# EAGLE board main LF (EAGLE 9.6.2)
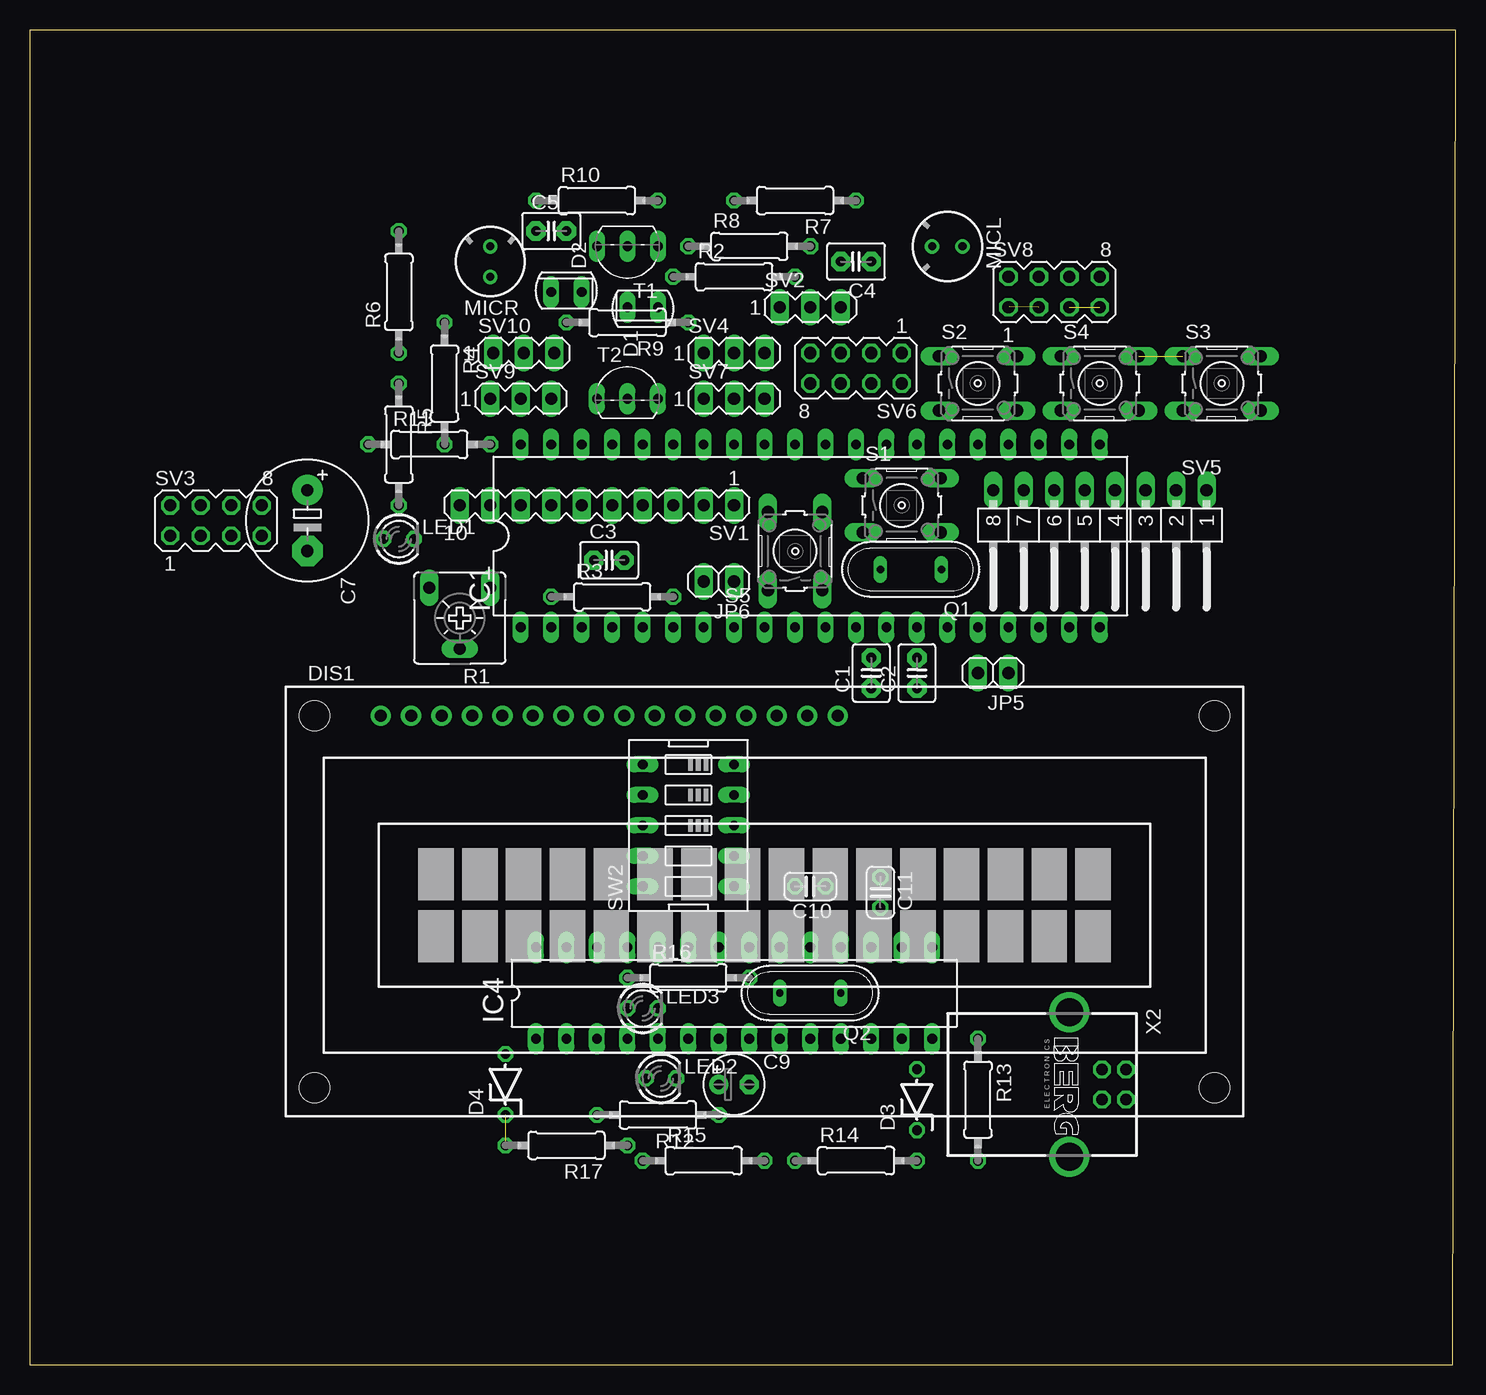
[diagram p0: board, top side]
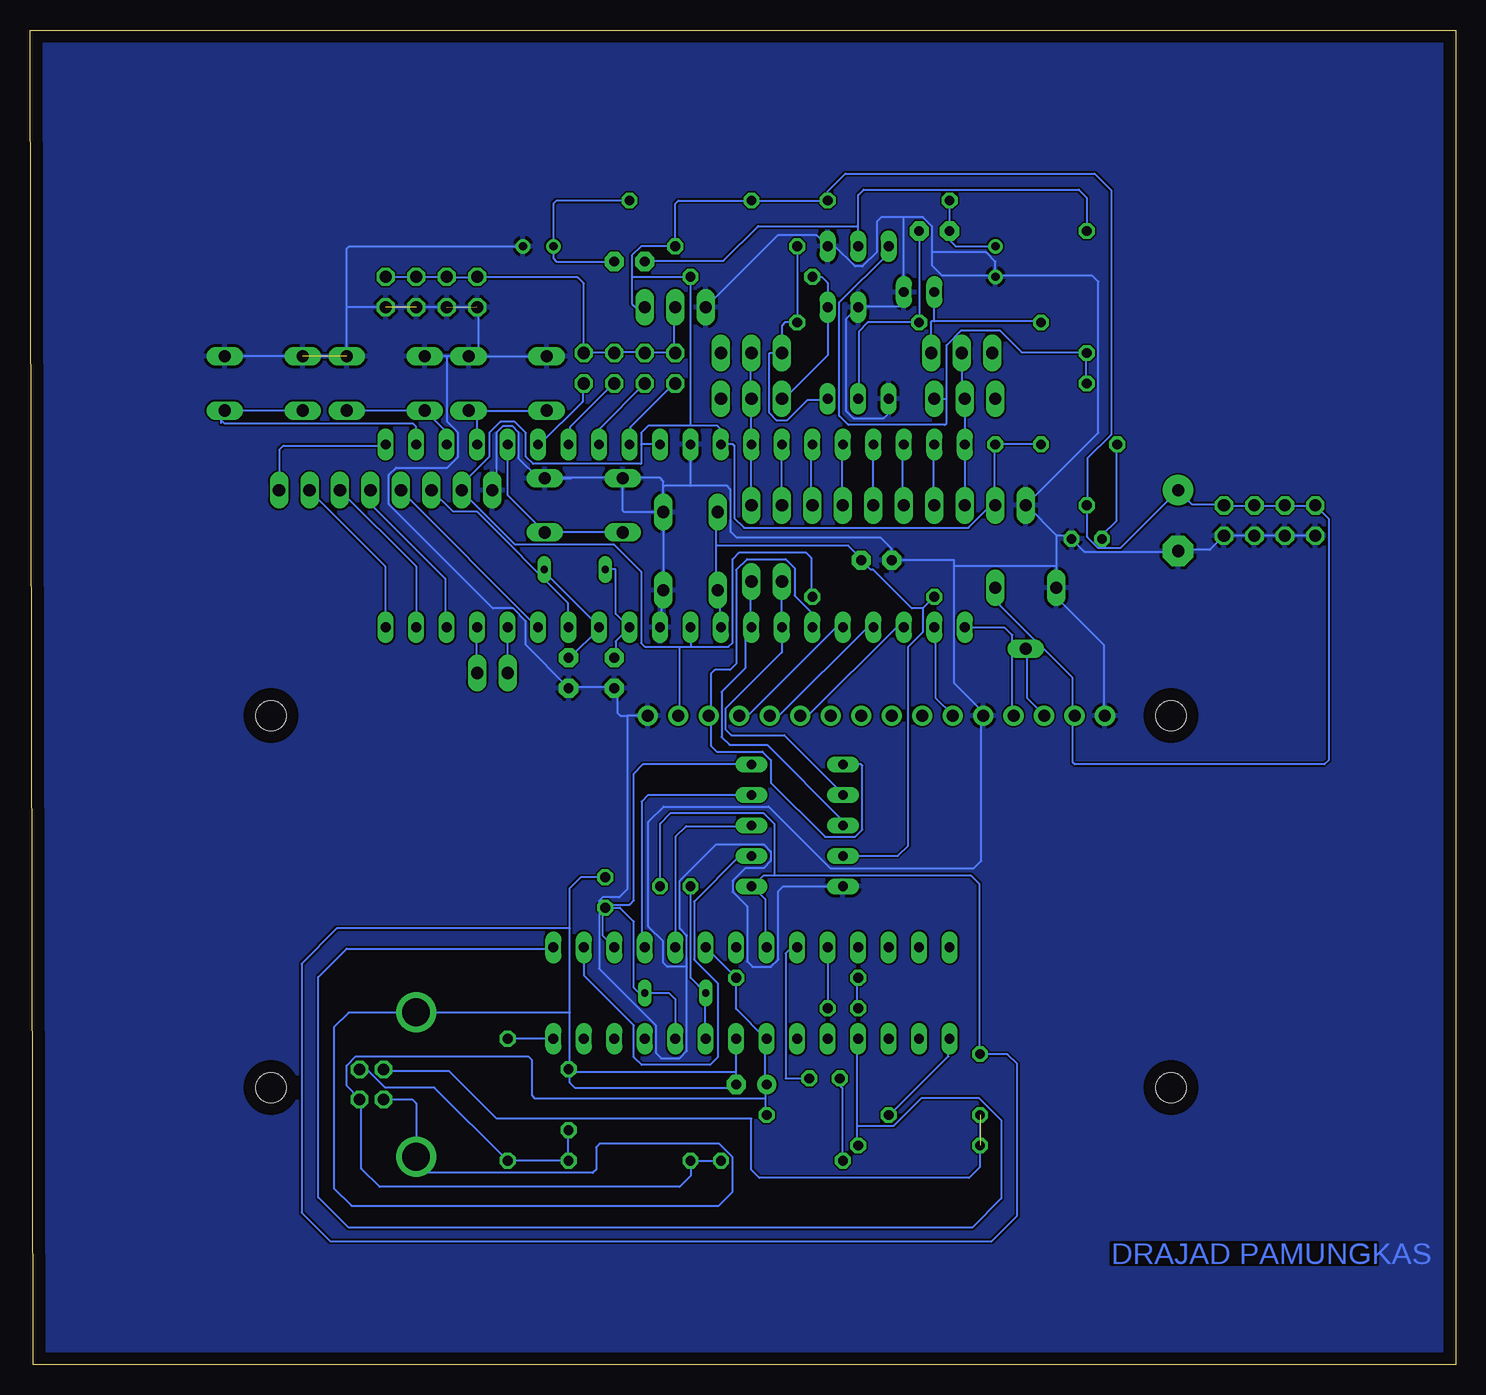
[diagram p1: board, bottom side, seen from below]

Size 118.8 x 111.24 mm. Coordinates in mm from the lower left corner, seen from the top.
Outline: 0,0 118.54,0 118.8,111.24 0,111.24 0,0
Copper layers (1*16): Top 0.035mm / dielectric 1.5mm / Bottom 0.035mm
Design rules "default": minimum track width 6mil, minimum drill 0.35mm, track to track 6mil, track to pad 6mil, pad to pad 6mil, via to via 6mil, smd to smd 6mil, copper to edge 40mil, drill to drill 6mil, minimum pad ring 10mil, minimum via ring 8mil, stop-mask expansion 4mil, vias tented up to drill 0mil, thermal gap 10mil

## Footprints (pad centres in the part's own frame; a part is rotated, then mirrored left to right if it is on the bottom)
C2.5-3 = drill 0.813 pad 1.6 octagon: 1 -1.27,0; 2 1.27,0
E5-10,5 = drill 1.016 pad 2.54: + -2.54,0 | drill 1.016 pad 2.54 octagon: - 2.54,0
E2,5-5 = drill 0.813 pad 1.6: + -1.27,0 | drill 0.813 pad 1.6 octagon: - 1.27,0
C025-024X044 = drill 0.813 octagon: 1 -1.27,0; 2 1.27,0
SFH225 = drill 0.813 long: A 0,1.27; K 0,-1.27
ZDIO-5 = drill 0.813 octagon: A 2.54,0; C -2.54,0
TUXGR_16X2_R2 = drill 1 pad 1.676: 1 -32,15.5; 2 -29.46,15.5; 3 -26.92,15.5; 4 -24.38,15.5; 5 -21.84,15.5; 6 -19.3,15.5; 7 -16.76,15.5; 8 -14.22,15.5; 9 -11.68,15.5; 10 -9.14,15.5; 11 -6.6,15.5; 12 -4.06,15.5; 13 -1.52,15.5; 14 1.02,15.5; 15 3.56,15.5; 16 6.1,15.5 | hole 2.5: -37.5,-15.5; 37.5,-15.5; -37.5,15.5; 37.5,15.5
DIL40 = drill 0.813 long: 1 -24.13,-7.62; 2 -21.59,-7.62; 3 -19.05,-7.62; 4 -16.51,-7.62; 5 -13.97,-7.62; 6 -11.43,-7.62; 7 -8.89,-7.62; 8 -6.35,-7.62; 9 -3.81,-7.62; 10 -1.27,-7.62; 11 1.27,-7.62; 12 3.81,-7.62; 13 6.35,-7.62; 14 8.89,-7.62; 15 11.43,-7.62; 16 13.97,-7.62; 17 16.51,-7.62; 18 19.05,-7.62; 19 21.59,-7.62; 20 24.13,-7.62; 21 24.13,7.62; 22 21.59,7.62; 23 19.05,7.62; 24 16.51,7.62; 25 13.97,7.62; 26 11.43,7.62; 27 8.89,7.62; 28 6.35,7.62; 29 3.81,7.62; 30 1.27,7.62; 31 -1.27,7.62; 32 -3.81,7.62; 33 -6.35,7.62; 34 -8.89,7.62; 35 -11.43,7.62; 36 -13.97,7.62; 37 -16.51,7.62; 38 -19.05,7.62; 39 -21.59,7.62; 40 -24.13,7.62
DIL28-3 = drill 0.813 long: 1 -16.51,-3.81; 2 -13.97,-3.81; 3 -11.43,-3.81; 4 -8.89,-3.81; 5 -6.35,-3.81; 6 -3.81,-3.81; 7 -1.27,-3.81; 8 1.27,-3.81; 9 3.81,-3.81; 10 6.35,-3.81; 11 8.89,-3.81; 12 11.43,-3.81; 13 13.97,-3.81; 14 16.51,-3.81; 15 16.51,3.81; 16 13.97,3.81; 17 11.43,3.81; 18 8.89,3.81; 19 6.35,3.81; 20 3.81,3.81; 21 1.27,3.81; 22 -1.27,3.81; 23 -3.81,3.81; 24 -6.35,3.81; 25 -8.89,3.81; 26 -11.43,3.81; 27 -13.97,3.81; 28 -16.51,3.81
1X02 = drill 1.016 long: 1 -1.27,0; 2 1.27,0
LED3MM = drill 0.813 octagon: A -1.27,0; K 1.27,0
F6050AP = drill 0.7 pad 1.2: 1 0,1.27; 2 0,-1.27
QS = drill 0.61 long: 1 -2.54,0; 2 2.54,0
CA6V = drill 1.016 long: A -2.54,-2.54; E 2.54,-2.54; S 0,2.54
0207/10 = drill 0.813 octagon: 1 -5.08,0; 2 5.08,0
B3F-10XX = drill 1.016 long: 1 -3.251,2.261; 2 3.251,2.261; 3 -3.251,-2.261; 4 3.251,-2.261
MA10-1 = drill 1.016 long: 1 -11.43,0; 2 -8.89,0; 3 -6.35,0; 4 -3.81,0; 5 -1.27,0; 6 1.27,0; 7 3.81,0; 8 6.35,0; 9 8.89,0; 10 11.43,0
MA03-1 = drill 1.016 long: 1 -2.54,0; 2 0,0; 3 2.54,0
MA04-2 = drill 1.016 octagon: 1 -3.81,-1.27; 2 -3.81,1.27; 3 -1.27,-1.27; 4 -1.27,1.27; 5 1.27,-1.27; 6 1.27,1.27; 7 3.81,-1.27; 8 3.81,1.27
MA08-1W = drill 1.016 long: 1 -8.89,0; 2 -6.35,0; 3 -3.81,0; 4 -1.27,0; 5 1.27,0; 6 3.81,0; 7 6.35,0; 8 8.89,0
EDG-05 = drill 0.813 long: 1 -5.08,-3.81; 2 -2.54,-3.81; 3 0,-3.81; 4 2.54,-3.81; 5 5.08,-3.81; 6 5.08,3.81; 7 2.54,3.81; 8 0,3.81; 9 -2.54,3.81; 10 -5.08,3.81
TO92-EBC = drill 0.813 long: B 0,-1.27; C 2.54,-1.27; E -2.54,-1.27
PN61729-S = drill 0.95 octagon: 1 1.25,4.71; 2 -1.25,4.71; 3 -1.25,2.71; 4 1.25,2.71 | drill 2.3 pad 2.9: S1 -6.02,0; S2 6.02,0

## Placement (x,y rotation side)
C1  22p  [C2.5-3]  70.1,57.66 90 top
C2  22p  [C2.5-3]  73.91,57.66 90 top
C3  10nF  [C2.5-3]  48.26,67.06 0 top
C4  100nF  [C2.5-3]  68.83,91.95 180 top
C5  100nF  [C2.5-3]  43.43,94.49 0 top
C7  1000uF/16V  [E5-10,5]  23.11,70.36 270 top
C9  10uF/16V  [E2,5-5]  58.67,23.37 0 top
C10  22pF  [C025-024X044]  65.02,39.88 180 top
C11  22pF  [C025-024X044]  70.87,39.37 270 top
D1  SFH225  [SFH225]  51.05,88.14 270 top
D2  SFH225  [SFH225]  44.7,89.41 90 top
D3  DZ3,6V  [ZDIO-5]  73.91,22.1 90 top
D4  DZ3,6V  [ZDIO-5]  39.62,23.37 90 top
DIS1  TUXGR_16X2_R2  [TUXGR_16X2_R2]  61.21,38.61 0 top
IC1  MEGA16-P  [DIL40]  65.02,69.09 0 top
IC4  MEGA8-P  [DIL28-3]  58.67,30.99 0 top
JP5  [1X02]  80.26,57.66 180 top
JP6  [1X02]  57.4,65.28 180 top
LED1  merah  [LED3MM]  30.73,68.83 0 top
LED2  Merah  [LED3MM]  52.58,23.88 0 top
LED3  hijau  [LED3MM]  51.05,29.72 0 top
MICL  MC  [F6050AP]  76.45,93.22 270 top
MICR  MC  [F6050AP]  38.35,91.95 180 top
Q1  8MHz  [QS]  73.41,66.29 180 top
Q2  12MHz  [QS]  65.02,30.99 180 top
R1  20K  [CA6V]  35.81,62.23 180 top
R2  56K  [0207/10]  58.67,90.68 0 top
R3  10K  [0207/10]  48.51,64.01 0 top
R4  56K  [0207/10]  34.54,81.79 270 top
R5  10K  [0207/10]  30.73,76.71 270 top
R6  100K  [0207/10]  30.73,89.41 90 top
R7  10K  [0207/10]  63.75,97.03 180 top
R8  10K  [0207/10]  59.94,93.22 0 top
R9  100K  [0207/10]  49.78,86.87 180 top
R10  10K  [0207/10]  47.24,97.03 0 top
R11  330  [0207/10]  33.27,76.71 0 top
R12  10K  [0207/10]  52.32,20.83 180 top
R13  68  [0207/10]  78.99,22.1 270 top
R14  2K2  [0207/10]  68.83,17.02 0 top
R15  330  [0207/10]  56.13,17.02 0 top
R16  330  [0207/10]  54.86,32.26 0 top
R17  68  [0207/10]  44.7,18.29 180 top
S1  [B3F-10XX]  72.64,71.63 0 top
S2  [B3F-10XX]  78.99,81.79 0 top
S3  [B3F-10XX]  99.31,81.79 0 top
S4  [B3F-10XX]  89.15,81.79 0 top
S5  [B3F-10XX]  63.75,67.82 90 top
SV1  [MA10-1]  47.24,71.63 180 top
SV2  [MA03-1]  65.02,88.14 0 top
SV3  [MA04-2]  15.49,70.36 0 top
SV4  [MA03-1]  58.67,84.33 0 top
SV5  [MA08-1W]  89.15,72.9 180 top
SV6  [MA04-2]  68.83,83.06 180 top
SV7  [MA03-1]  58.67,80.52 0 top
SV8  [MA04-2]  85.34,89.41 0 top
SV9  [MA03-1]  40.89,80.52 0 top
SV10  [MA03-1]  41.15,84.33 0 top
SW2  [EDG-05]  54.86,44.96 90 top
T1  [TO92-EBC]  49.78,91.95 180 top
T2  [TO92-EBC]  49.78,81.79 0 top
X2  PN61729-S  [PN61729-S]  86.61,23.37 270 top

## Library data of the parts
C1-C5 = capacitor-wima
C7 C9-C11 R2-R11 = rcl
D1 D2 = opto-trans-siemens; OC_FARNELL: unknown; OC_NEWARK: unknown
D3 D4 = diode
DIS1 = display-lcd; OC_FARNELL: unknown; OC_NEWARK: unknown
IC1 = atmel; MPN: ATMEGA16-16PU; OC_FARNELL: 9171142; OC_NEWARK: 01M6885
IC4 = atmel
JP5 JP6 = pinhead
LED1-LED3 = led
MICL MICR = microphon
Q1 Q2 SW2 = special
R1 = pot
R12-R17 = resistor
S1-S5 = switch-omron; MPN: B3F-1000; OC_FARNELL: 176432; OC_NEWARK: 36M3542
SV1-SV10 = con-lstb; OC_FARNELL: unknown; OC_NEWARK: unknown
T1 T2 = transistor
X2 = con-berg

## Nets
DGND: C9.- C10.1 C11.1 D3.A D4.A IC4.8 IC4.22 SW2.1 X2.4 X2.S1 X2.S2
GND: C1.1 C2.1 C3.1 C7.- D1.K D2.K DIS1.1 DIS1.5 DIS1.16 IC1.11 IC1.31 LED1.K MICL.1 MICR.1 R1.E S1.1 S1.2 S2.1 S2.2 S3.1 S3.2 S4.1 S4.2 S5.3 S5.4 SV1.10 SV2.1 SV3.1 SV3.3 SV3.5 SV3.7 SV5.8 SV8.1 SV8.3 SV8.5 SV8.7 SW2.10 T1.E T2.E
MISO: IC1.7 JP6.2 SW2.7
MOSI: DIS1.14 IC1.6 SW2.6
N$1: IC1.33 SV1.1 SV4.2 SV7.2
N$2: IC1.34 SV1.2
N$3: IC1.35 SV1.3
N$4: IC1.36 SV1.4
N$5: IC1.37 SV1.5
N$6: IC1.38 SV1.6
N$7: IC1.39 SV1.7
N$8: D2.A R4.1 SV10.3
N$9: IC1.24 S2.3 S2.4
N$10: DIS1.13 IC1.5
N$11: DIS1.12 IC1.4
N$12: DIS1.11 IC1.3
N$13: DIS1.6 IC1.2
N$14: R5.1 R6.1 SV9.3 T1.C
N$15: DIS1.3 R1.S
N$16: C1.2 IC1.12 Q1.2
N$17: C2.2 IC1.13 Q1.1
N$18: DIS1.4 IC1.1
N$19: D1.A R2.1 SV7.1
N$20: IC1.23 S4.3 S4.4
N$21: IC1.40 SV1.8 SV9.2 SV10.2
N$22: C4.2 R6.2 T1.B
N$23: C4.1 MICL.2 R7.1
N$24: R8.1 R9.1 SV4.1 T2.C
N$25: C5.2 R9.2 T2.B
N$26: C5.1 MICR.2 R10.1
N$27: IC1.22 S3.3 S3.4
N$28: IC1.25 S1.3 S1.4
N$30: IC1.21 SV5.1
N$32: IC1.20 SV5.2
N$33: IC1.19 SV5.3
N$34: IC1.18 SV5.4
N$35: IC1.15 SV5.5
N$36: IC1.14 SV5.6
N$37: IC1.16 JP5.2
N$38: IC1.17 JP5.1
N$41: LED1.A R11.1
N$42: IC4.1 R12.2
N$44: IC1.26 SV6.2
N$45: IC1.27 SV6.4
N$46: IC1.28 SV6.6
N$47: IC1.29 SV6.8
N$51: C10.2 IC4.9 Q2.2
N$52: C11.2 IC4.10 Q2.1
N$53: IC4.14 R13.1
N$55: LED2.A R15.1
N$56: LED3.A R16.1
N$57: IC4.23 LED2.K
N$58: IC4.24 LED3.K
N$59: D4.C R17.2 X2.3
N$67: IC4.4 IC4.15 R17.1
N$69: D3.C R13.2 R14.2 X2.2
N$175: IC4.17 SW2.5
N$176: IC4.18 SW2.4
N$177: IC4.19 SW2.3
N$178: IC4.16 SW2.2
RESET: C3.2 IC1.9 R3.1 S5.1 S5.2 SW2.9
SCK: IC1.8 JP6.1 SW2.8
VCC: C7.+ DIS1.2 DIS1.15 IC1.10 IC1.30 IC1.32 R1.A R2.2 R3.2 R4.2 R5.2 R7.2 R8.2 R10.2 R11.2 SV1.9 SV2.3 SV3.2 SV3.4 SV3.6 SV3.8 SV5.7
VDD: SV2.2 SV6.1 SV6.3 SV6.5 SV6.7 SV8.2 SV8.4 SV8.6 SV8.8
VPP: C9.+ IC4.7 IC4.20 R12.1 R14.1 R15.2 R16.2 X2.1

## Tracks (layer width: path | path; a pad name or v marks a point on that pad's centre or on a via)
DGND
  Bottom 0.152: 56.74,40.79 57.66,40.79 58.57,39.88 | 56.74,40.79 40.39,40.79 39.67,40.08 39.67,26.01 D4.A 37.34,25.91 36.52,25.09 36.52,12.45 38.66,10.31 93.78,10.31 96.16,12.7 96.16,33.43 93.22,36.37 73.81,36.37 | 58.57,39.88 57.51,38.81 57.51,34.85 IC4.22 | 58.57,39.88 SW2.1 | C10.1 66.29,45.11 65.43,45.97 57.66,45.97 56.74,45.06 56.74,40.79 | X2.4 86.94,22.12 86.61,21.79 X2.S2 86.61,16.26 86.36,16 71.88,16 71.63,16.26 71.63,18.14 71.32,18.44 61.37,18.44 60.25,17.32 60.25,14.43 61.42,13.26 92,13.26 93.47,14.73 93.47,28.14 92.25,29.36 86.61,29.36 | 59.94,24.43 C9.- 60.2,23.11 73.41,23.11 73.81,23.52 73.81,24.43 | 59.94,24.43 IC4.8 | C11.1 72.9,40.64 73.81,39.73 73.81,36.37 | 73.81,24.74 73.81,29.36 | 73.81,29.36 73.81,36.37 | 73.81,24.43 59.94,24.43 | 73.81,29.36 86.61,29.36 | 86.61,29.36 X2.S1 | 73.81,24.43 73.81,24.74 | D3.A 73.81,24.74
GND  (4 unrouted)
  Bottom 0.152: T2.E 47.24,79.3 47.65,78.89 50.19,78.89 50.8,79.5 50.8,87.12 D1.K 49.73,88.19 46.28,88.19 45.97,88.49 D2.K 45.97,95.66 | 43.64,92.71 43.64,94.89 44.4,95.66 45.97,95.66 | 43.64,92.71 43.64,91.64 42.77,90.78 30.28,90.78 29.77,90.27 29.77,77.67 SV1.10 35.71,71.58 33.27,69.14 | 45.97,95.66 47.85,95.66 48.21,95.3 48.21,92.76 49.43,91.54 50.04,91.54 51.71,93.22 T1.E 53.24,94.13 56.49,94.13 SV2.1 | 66.04,64.57 66.19,64.41 66.19,61.52 IC1.11 | 63.75,73.25 IC1.31 | 66.04,64.57 S5.3 | 14.22,69.14 11.79,69.14 SV3.1 | 14.22,69.14 16.66,69.14 SV3.5 16.82,69.14 19.25,69.14 SV3.7 20.47,67.92 23.06,67.92 C7.- 23.22,67.77 30.94,67.77 LED1.K 32.31,69.14 33.27,69.14 | 14.22,69.14 SV3.3 | 33.27,69.14 33.27,66.55 | 33.27,66.55 R1.E 33.27,63.96 29.31,60 29.31,54.2 DIS1.1 | 33.27,66.55 41.81,66.55 | 41.81,66.55 41.81,67.06 C3.1 46.99,68.02 47.9,68.94 59.92,68.94 60.4,69.42 60.4,72.95 60.71,73.25 63.75,73.25 | 41.81,66.55 41.81,56.84 39.52,54.56 39.52,54.2 DIS1.5 39.52,54.05 39.52,42.01 40.13,41.4 52.12,41.4 57.25,46.53 65.99,46.53 67.26,45.26 67.26,36.52 66.04,35.31 66.04,33.53 65.68,33.17 64.06,33.17 | 92.43,84.07 102.46,84.07 S3.2 | 81.43,84.07 82.19,84.07 S2.2 | 81.43,84.07 75.79,84.07 S2.1 | 84.02,84.07 82.35,84.07 S2.2 | 84.02,84.07 85.85,84.07 S4.1 | 81.58,88.19 SV8.1 | 81.43,84.07 81.43,88.04 SV8.1 | 81.43,84.07 S2.2 | SW2.10 56.03,39.88 56.44,39.47 56.44,33.78 57.05,33.17 58.57,33.17 59.03,33.63 59.03,38.2 60.25,39.42 60.25,40.34 59.18,41.4 57.66,41.4 57.05,42.01 57.05,42.77 57.66,43.38 61.62,43.38 64.67,40.34 64.67,36.37 64.06,35.76 64.06,33.17 | 64.06,33.17 64.06,26.16 64.67,25.55 66.19,25.55 66.65,26.01 66.65,28.3 71.37,33.02 71.37,38.66 71.07,38.96 69.7,38.96 69.04,39.62 69.04,54.11
  Bottom 0.152: 84.02,84.07 84.02,78.59 83.11,77.67 83.11,75.69 84.02,74.78 88.29,74.78 88.9,74.17 88.9,71.73 80.21,63.04 78.54,63.04 77.47,61.98 77.47,60 73.97,56.49 C2.1 73.81,56.49 70.16,56.49 C1.1 69.85,56.13 69.85,54.36 69.6,54.11 69.04,54.11 | MICL.1 92.2,93.22 92.41,93.02 92.41,88.14 | S4.2 92.41,88.14 | 92.41,88.14 SV8.7 SV8.1 | MICR.1 38.35,91.95 39.12,92.71 43.64,92.71 | DIS1.16 69.04,54.11 | 69.42,73.91 S1.1 69.39,71.17 69.29,71.07 S5.4 | 73.66,73.91 66.29,73.91 66.02,73.64 66.02,73.15 | 73.66,73.91 76.45,73.91 78.11,75.56 78.11,77.74 78.63,78.26 79.36,78.26 79.88,77.74 79.88,73.28 SV5.8 | S5.4 66.02,64.59 66.04,64.57 | S5.4 66.02,73.15 | 63.75,73.25 65.91,73.25 66.02,73.15 | S1.2 73.69,73.89 73.66,73.91
  pour Bottom: -0.25,110.49 118.62,110.49 118.62,0 -0.25,0
MISO
  Bottom 0.152: SW2.7 51.05,47.6 55.93,52.48 60.35,52.48 60.86,52.98 60.86,54.66 56.13,59.39 IC1.7 JP6.2
MOSI
  Bottom 0.152: SW2.6 49.53,50.04 49.43,49.94 49.43,44.6 50.04,43.99 52.53,43.99 57.05,48.51 57.05,50.39 57.76,51.11 61.57,51.11 62.06,51.59 62.06,54.28 | 62.06,54.28 62.06,57.58 61.72,57.91 60.45,57.91 59.94,58.42 59.94,66.24 59.03,67.16 55.83,67.16 55.07,66.4 55.07,64.11 53.7,62.74 53.7,61.57 IC1.6 | DIS1.14 62.06,54.28
N$1
  Bottom 0.152: SV1.1 58.73,71.73 58.73,76.61 IC1.33 58.73,76.76 58.73,80.42 SV7.2 58.73,80.57 58.73,84.23 SV4.2
N$2
  Bottom 0.152: SV1.2 IC1.34
N$3
  Bottom 0.152: IC1.35 53.7,76.61 53.7,71.73 SV1.3
N$4
  Bottom 0.152: IC1.36 51.1,76.61 51.1,71.73 SV1.4
N$5
  Bottom 0.152: SV1.5 IC1.37
N$6
  Bottom 0.152: IC1.38 46.08,76.61 46.08,71.73 SV1.6
N$7
  Bottom 0.152: IC1.39 43.48,76.61 43.48,71.73 SV1.7
N$8
  Bottom 0.152: R4.1 34.65,86.97 43.43,86.97 | 43.33,89.41 D2.A 43.43,86.97 | 43.43,86.97 43.69,86.97 SV10.3
N$9
  Bottom 0.152: 81.58,78.89 81.58,76.76 IC1.24 | 81.58,78.89 82.19,79.5 S2.4 81.58,78.89 | 81.58,78.89 80.97,79.5 75.79,79.5 S2.3
N$10
  Bottom 0.152: IC1.5 51.1,61.37 51.71,61.37 58.88,54.2 59.64,54.2 DIS1.13
N$11
  Bottom 0.152: IC1.4 48.51,61.37 49.12,61.37 56.29,54.2 57.05,54.2 DIS1.12
N$12
  Bottom 0.152: IC1.3 46.08,61.37 46.69,61.37 53.85,54.2 54.61,54.2 DIS1.11
N$13
  Bottom 0.152: IC1.2 43.33,61.37 43.33,55.58 41.96,54.2 DIS1.6
N$14
  Bottom 0.152: R5.1 30.84,81.79 30.84,84.23 R6.1 30.84,84.38 36.17,84.38 38,86.21 41.2,86.21 42.42,84.99 42.42,80.52 | T1.C 47.3,93.22 47.3,92.61 51.36,88.54 51.36,79.1 50.6,78.33 42.57,78.33 42.42,78.49 42.42,80.52 | SV9.3 42.42,80.52
N$15
  Bottom 0.152: R1.S 35.71,59.69 35.71,55.58 34.34,54.2 DIS1.3
N$16
  Bottom 0.152: Q1.2 70,66.29 70,62.59 68.94,61.52 IC1.12 70,60.3 70,58.93 C1.2
N$17
  Bottom 0.152: Q1.1 75.95,66.09 71.37,61.52 IC1.13 71.37,61.37 73.81,58.93 C2.2
N$18
  Bottom 0.152: IC1.1 37.59,61.47 36.93,60.81 36.93,54.2 DIS1.4
N$19
  Bottom 0.152: R2.1 52.83,90.68 52.32,90.17 D1.A 52.32,84.12 55.93,80.52 SV7.1
N$20
  Bottom 0.152: IC1.23 84.18,76.76 84.18,77.83 85.85,79.5 S4.3 86,79.5 92.41,79.5 S4.4
N$21
  Bottom 0.152: SV1.8 IC1.40 SV9.2 41.15,80.77 SV10.2
N$22
  Bottom 0.152: C4.2 67.56,92 61.01,92 58.12,94.89 49.89,94.89 49.78,95 | T1.B 49.78,95 | 49.78,95 49.78,97.48 49.33,97.94 31.39,97.94 30.73,97.28 R6.2
N$23
  Bottom 0.152: R7.1 74.93,97.03 75.18,96.77 MICL.2 75.18,92.2 74.93,91.95 C4.1
N$24
  Bottom 0.152: T2.C 52.32,80.42 54,80.42 55.68,78.74 56.59,78.74 57.2,79.35 57.2,84.28 57.15,84.33 SV4.1 56.13,86.61 55.88,86.87 R9.1 R8.1
N$25
  Bottom 0.152: C5.2 R9.2 48.97,86.87 49.73,86.11 49.73,80.57 T2.B
N$26
  Bottom 0.152: MICR.2 41.66,93.22 42.16,93.73 C5.1 R10.1
N$27
  Bottom 0.152: IC1.22 86.61,78.18 86.87,78.44 102.56,78.44 102.87,78.74 | 102.87,78.49 102.87,79.22 S3.4 S3.3
N$28
  Bottom 0.152: IC1.25 78.99,72.49 75.95,69.44 S1.4 75.79,69.44 69.39,69.44 S1.3
N$30
  Bottom 0.152: IC1.21 89.2,76.61 97.69,76.61 98.04,76.25 SV5.1
N$32
  Bottom 0.152: IC1.20 89.2,61.52 89.2,66.55 95.45,72.8 SV5.2
N$33
  Bottom 0.152: IC1.19 86.61,66.55 SV5.3
N$34
  Bottom 0.152: IC1.18 84.18,61.52 84.18,65.53 90.42,71.78 SV5.4
N$35
  Bottom 0.152: IC1.15 76.56,61.52 87.83,72.8 SV5.5
N$36
  Bottom 0.152: SV5.6 83.57,71.12 81.58,71.12 73.97,63.5 73.97,61.52 IC1.14
N$37
  Bottom 0.152: JP5.2 IC1.16
N$38
  Bottom 0.152: IC1.17 81.58,61.37 81.58,57.71 JP5.1
N$41
  Bottom 0.152: R11.1 28.24,76.61 28.24,70.36 29.46,69.14 LED1.A
N$42
  Bottom 0.152: IC4.1 42.27,27.08 42.27,25.7 47.14,20.83 R12.2
N$44
  Bottom 0.152: SV6.2 72.75,81.79 72.75,80.26 76.3,76.71 IC1.26
N$45
  Bottom 0.152: IC1.27 73.81,76.76 73.81,78.13 70.16,81.79 SV6.4
N$46
  Bottom 0.152: IC1.28 71.37,77.98 SV6.6
N$47
  Bottom 0.152: IC1.29 68.78,76.76 68.78,78.13 65.13,81.79 SV6.8
N$51
  Bottom 0.152: IC4.9 62.53,27.23 62.53,30.89 Q2.2 63.75,32.26 C10.2
N$52
  Bottom 0.152: IC4.10 65.02,30.48 65.53,30.99 Q2.1 68.02,30.99 68.48,31.45 68.48,36.93 69.65,38.1 C11.2
N$53
  Bottom 0.152: IC4.14 75.18,27.23 78.99,27.23 R13.1
N$55
  Bottom 0.152: LED2.A 51.31,23.27 51.1,23.06 51.1,17.02 R15.1
N$56
  Bottom 0.152: LED3.A 49.89,29.82 49.89,32.26 R16.1
N$57
  Bottom 0.152: IC4.23 55.32,34.8 55.83,34.29 55.83,23.88 LED2.K
N$58
  Bottom 0.152: IC4.24 LED3.K
N$59  (1 unrouted)
  Bottom 0.152: 39.67,20.83 D4.C 39.62,16.51 40.54,15.6 58.01,15.6 58.67,16.26 58.67,20.52 79.91,20.52 83.87,24.49 89.2,24.49 X2.3
N$67
  Bottom 0.152: 49.89,19.91 49.89,27.08 IC4.4 | 49.89,19.91 49.89,18.39 R17.1 | 49.89,19.91 46.84,19.91 44.5,22.25 39.73,22.25 37.85,20.37 37.85,13.87 40.28,11.43 92.25,11.43 94.79,13.97 94.79,32.31 92.41,34.7 75.18,34.7 IC4.15
N$69
  Bottom 0.152: 73.97,17.02 73.97,19.46 D3.C | 73.97,17.02 R13.2 85.09,23.11 89.2,23.11 90.58,24.49 91.19,24.49 X2.2 | 73.97,17.02 R14.2
N$175
  Bottom 0.152: SW2.5 67.72,50.04 68.48,49.28 68.48,38.71 68.83,38.35 70.46,38.35 71.07,37.74 71.07,35.76 IC4.17
N$176
  Bottom 0.152: SW2.4 67.26,47.5 67.82,46.94 67.82,35.05 IC4.18
N$177
  Bottom 0.152: SW2.3 58.73,44.91 64.11,44.91 64.97,44.04 64.97,34.85 IC4.19
N$178
  Bottom 0.152: SW2.2 59.64,42.42 63.45,38.61 63.45,33.78 61.47,31.8 61.47,25.65 62.13,24.99 67.82,24.99 68.48,25.65 68.48,28.3 72.59,32.41 72.59,34.7 IC4.16
RESET
  Bottom 0.152: IC1.9 61.32,61.52 61.32,64.41 61.47,64.57 S5.1 61.62,64.57 61.62,68.28 | 61.62,68.28 61.62,70.97 S5.2 | 44.4,63.04 44.4,61.06 45.62,59.84 45.62,43.28 46.48,42.42 SW2.9 | R3.1 44.4,63.04 | 44.4,63.04 45.31,63.04 48.56,66.29 48.77,66.29 C3.2 49.53,67.21 50.6,68.28 61.62,68.28
SCK
  Bottom 0.152: JP6.1 58.73,65.18 58.73,61.52 IC1.8 58.73,61.37 59.18,60.91 59.18,58.06 61.16,56.08 61.16,52.32 60.5,51.66 57.35,51.66 51.05,45.36 SW2.8
VCC
  Bottom 0.152: 31.9,54.26 31.9,57.25 38.3,63.65 38.3,64.72 R1.A | 14.22,71.58 11.79,71.58 SV3.2 10.57,70.51 10.57,50.39 10.92,50.04 31.75,50.04 31.9,50.19 31.9,54.26 | 14.22,71.58 16.66,71.58 SV3.6 16.82,71.58 19.25,71.58 SV3.8 19.41,71.73 22,71.73 23.06,72.8 C7.+ 27.94,68.07 29.77,68.07 30.68,68.99 30.68,71.58 R5.2 30.68,71.73 30.68,75.54 28.7,77.52 28.7,97.89 30.07,99.26 50.85,99.26 52.32,97.79 R10.2 R7.2 | 14.22,71.58 SV3.4 | 58.73,97.03 R7.2 | R3.2 53.7,64.11 53.7,67.26 54.15,67.72 59.69,67.72 60.25,67.16 60.25,60.2 60.6,59.84 63.75,59.84 | DIS1.15 64.67,54.2 64.67,59.79 64.62,59.84 | R4.2 34.65,76.76 38.3,76.76 R11.2 38.46,76.61 38.46,71.73 SV1.9 38.46,71.58 38.76,71.58 40.59,69.75 59.28,69.75 60.1,70.56 60.1,76.61 60.2,76.71 IC1.32 61.21,77.98 61.52,78.28 63.75,78.28 | 63.75,78.28 63.75,90.63 | 63.75,90.63 R2.2 | 64.62,59.84 63.75,59.84 | IC1.10 63.75,59.84 | 64.62,59.84 67.56,59.84 67.87,60.15 67.87,66.09 70.16,68.38 78.38,68.38 82.8,72.8 SV5.7 82.8,73.41 80.52,75.69 80.52,77.67 79.6,78.59 78.38,78.59 77.47,77.67 77.47,75.69 76.86,75.08 67.87,75.08 67.87,76.71 | DIS1.2 31.9,54.26 | 67.87,76.71 67.87,77.67 67.26,78.28 63.75,78.28 | IC1.30 67.87,76.71 | R7.2 64.77,97.03 65.02,96.77 R8.2 67.87,93.22 68.63,92.46 68.63,90.68 | SV2.3 68.33,88.14 68.63,88.44 68.63,90.68 | 63.75,90.63 68.58,90.63 68.63,90.68
VDD
  Bottom 0.152: 86.61,90.63 84.18,90.63 SV8.4 84.02,90.63 81.58,90.63 SV8.2 81.43,90.63 73.15,90.63 72.64,90.12 SV6.1 72.59,84.38 70.16,84.38 SV6.3 70,84.38 67.56,84.38 | 86.61,90.63 89.05,90.63 SV8.8 | 86.61,90.63 SV8.6 | 67.56,84.38 65.13,84.38 | 65.13,84.38 65.13,88.54 65.02,88.44 SV2.2 | 65.13,84.38 SV6.7 | 67.56,84.38 SV6.5
VPP
  Bottom 0.152: IC4.20 R16.2 59.94,29.67 57.51,27.23 IC4.7 57.51,27.08 57.51,23.42 C9.+ 57.51,23.27 57.51,22.2 | 57.51,22.2 57.51,20.83 R12.1 | R15.2 R14.1 63.75,15.75 64.67,14.83 89.66,14.83 91.19,16.36 91.19,22.05 X2.1 91.34,22.2 92.41,23.27 92.41,24.94 91.64,25.7 77.27,25.7 76.96,25.4 76.96,22.45 76.71,22.2 57.51,22.2

## Text on the board
Bottom: DRAJAD PAMUNGKAS